# EAGLE board treiber (EAGLE 6.4)
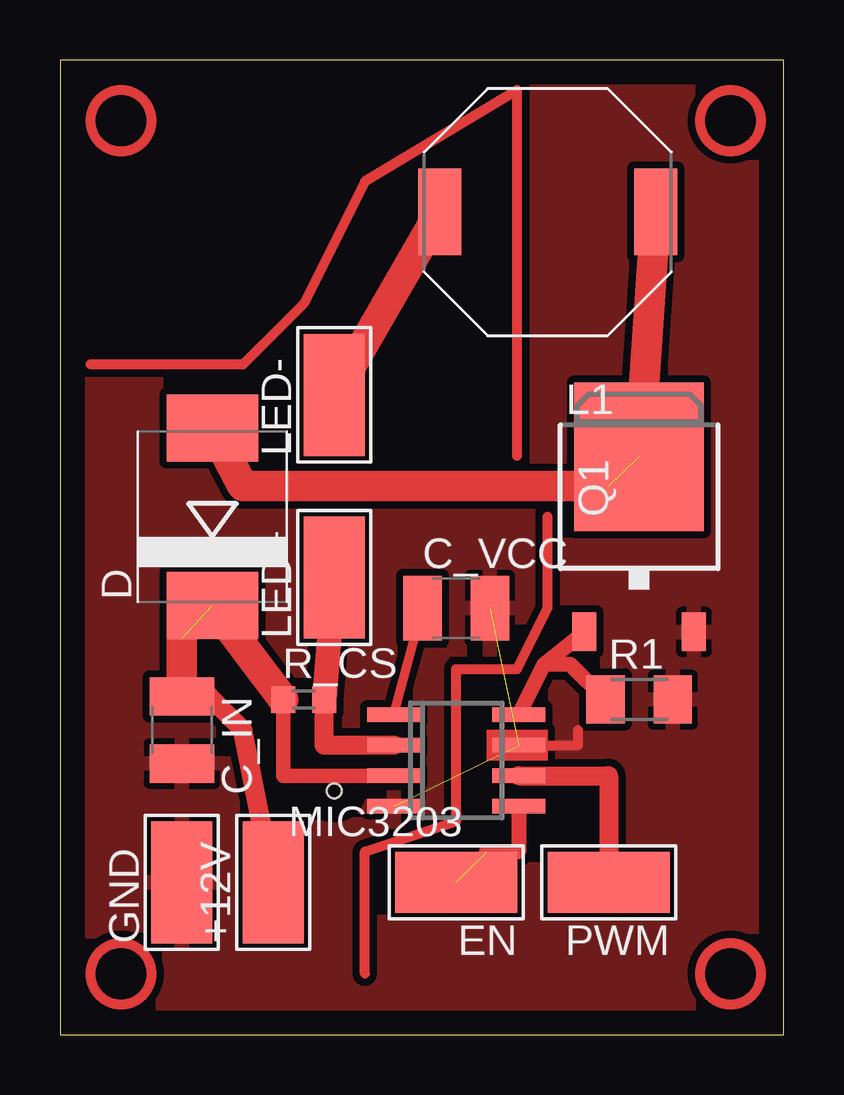
[diagram p0: board, top side]

Size 30.15 x 40.63 mm. Coordinates in mm from the lower left corner, seen from the top.
Outline: 0,0 30.15,0 30.15,40.63 0,40.63 0,0
Copper layers (1*16): Top 0.035mm / dielectric 1.5mm / Bottom 0.035mm
Design rules "default *": minimum track width 12mil, minimum drill 24mil, track to track 12mil, track to pad 12mil, pad to pad 12mil, via to via 12mil, smd to smd 8mil, copper to edge 40mil, drill to drill 8mil, minimum pad ring 12mil, minimum via ring 12mil, stop-mask expansion 4mil, vias tented up to drill 0mil, thermal gap 10mil
Holes 0.6 mm at 11.43,10.16

## Footprints (pad centres in the part's own frame; a part is rotated, then mirrored left to right if it is on the bottom)
5-2,5 = smd 2.54 x 5.08: 1 0,0
C1210 = smd 1.6 x 2.7: 1 -1.4,0; 2 1.4,0
SMC = smd 2.8 x 3.8: A 3.7,0; C -3.7,0
WE-TPC_1028/1038 = smd 3.6 x 1.8: 1 0,4.5; 2 0,-4.5
SO08 = smd 0.6 x 2.2: 1 -1.905,-2.6; 2 -0.635,-2.6; 3 0.635,-2.6; 4 1.905,-2.6; 5 1.905,2.6; 6 0.635,2.6; 7 -0.635,2.6; 8 -1.905,2.6
TO252 = smd 1 x 1.6: 1 -2.28,-4.8; 2 2.28,-4.8 | smd 5.4 x 6.2: 3 0,2.5
M1206 = smd 1.6 x 2: 1 -1.4,0; 2 1.4,0
R0603 = smd 1 x 1.1: 1 -0.85,0; 2 0.85,0

## Placement (x,y rotation side)
+12V  [5-2,5]  8.89,6.35 0 top
C_IN  10uf  [C1210]  5.08,12.7 270 top
C_VCC  10F  [C1210]  16.51,17.78 0 top
D  60V  [SMC]  6.35,21.59 90 top
EN  [5-2,5]  16.51,6.35 90 top
GND  [5-2,5]  5.08,6.35 0 top
L1  47uH  [WE-TPC_1028/1038]  20.32,34.29 90 top
LED+  [5-2,5]  11.43,19.05 0 top
LED-  [5-2,5]  11.43,26.67 0 top
MIC3203  MIC3203  [SO08]  16.51,11.43 270 top
PWM  [5-2,5]  22.86,6.35 90 top
Q1  IPD640N06L G  [TO252]  24.13,21.59 0 top
R1  10k  [M1206]  24.13,13.97 0 top
R_CS  0,16  [R0603]  10.16,13.97 0 top

## Library data of the parts
+12V EN GND LED+ LED- PWM = wirepad
C_IN C_VCC R1 R_CS = resistor
D = diode
L1 = WE-TPC; MPN: 744066680; OC_FARNELL: 2082588; OC_NEWARK: 88T7031; PACKAGE: 1038; SUPPLIER: WURTH ELEKTRONIK
MIC3203 = micrel
Q1 = transistor-fet

## Nets
GND: C_IN.2 C_VCC.2 GND.1 MIC3203.4 MIC3203.7 Q1.2 R1.2
IRFU: MIC3203.8 Q1.1 R1.1
N$1: L1.1 LED-.1
N$2: +12V.1 C_IN.1 D.C MIC3203.3 R_CS.1
N$3: D.A L1.2 Q1.3
N$4: LED+.1 MIC3203.2 R_CS.2
N$5: C_VCC.1 MIC3203.1
N$6: EN.1 MIC3203.5
PWM: MIC3203.6 PWM.1

## Tracks (layer width: path | path; a pad name or v marks a point on that pad's centre or on a via)
GND  (2 unrouted)
  Top 0.406: MIC3203.7 21.59,12.06 21.59,12.7
  pour Top: -1.27,40.64 -1.27,-1.27 30.48,-1.27 30.48,40.64
IRFU
  Top 0.635: MIC3203.8 20.16,15.44 | 20.16,15.44 Q1.1 | R1.1 21.26,15.44 20.16,15.44
N$1
  Top 1.27: L1.1 LED-.1
N$2  (1 unrouted)
  Top 0.6: MIC3203.3 9.31,10.79 R_CS.1
  Top 0.8: +12V.1 7.62,12.7 6.22,14.1 C_IN.1
  Top 1.27: 5.08,16.51 C_IN.1 | R_CS.1 D.C
N$3  (1 unrouted)
  Top 1.27: Q1.3 L1.2 | D.A 7.62,22.86 22.86,22.86
N$4
  Top 0.8: MIC3203.2 11.01,12.06 R_CS.2
  Top 1.016: R_CS.2 LED+.1
N$5
  Top 0.381: MIC3203.1 C_VCC.1
N$6  (1 unrouted)
  Top 0.635: MIC3203.5 19.11,7.62 17.78,7.62
N$10
  Top 0.406: 12.7,2.54 12.7,7.62 16.51,8.89 16.51,15.24 19.05,15.24 20.32,17.78 20.32,21.59
N$11
  Top 0.406: 19.05,24.13 19.05,39.37 12.7,35.56 10.16,30.48 7.62,27.94 1.27,27.94
PWM
  Top 0.8: MIC3203.6 22.86,10.79 PWM.1
(copper drawn outside any net)
  shapes: Top area x1, Top circle x4